# Allegro board F247_POWE_V12D.brd
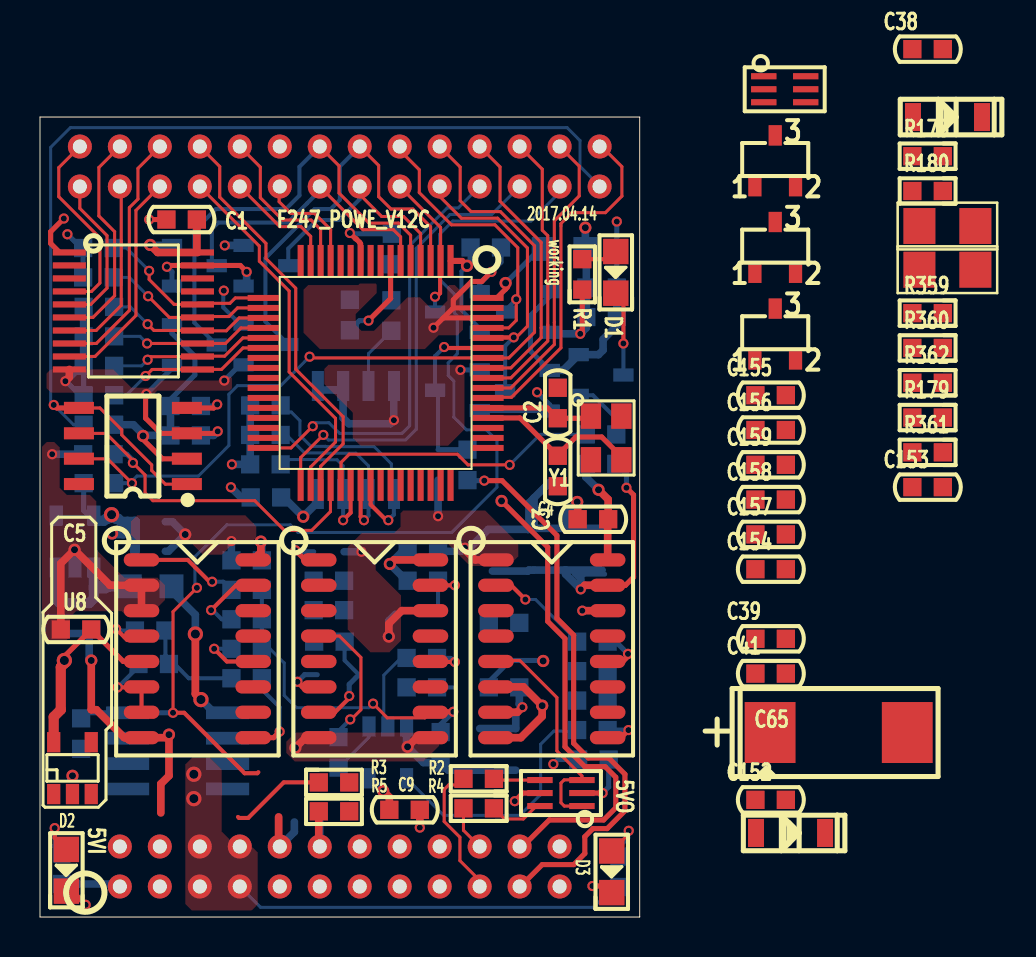
[diagram p0: board, top side]
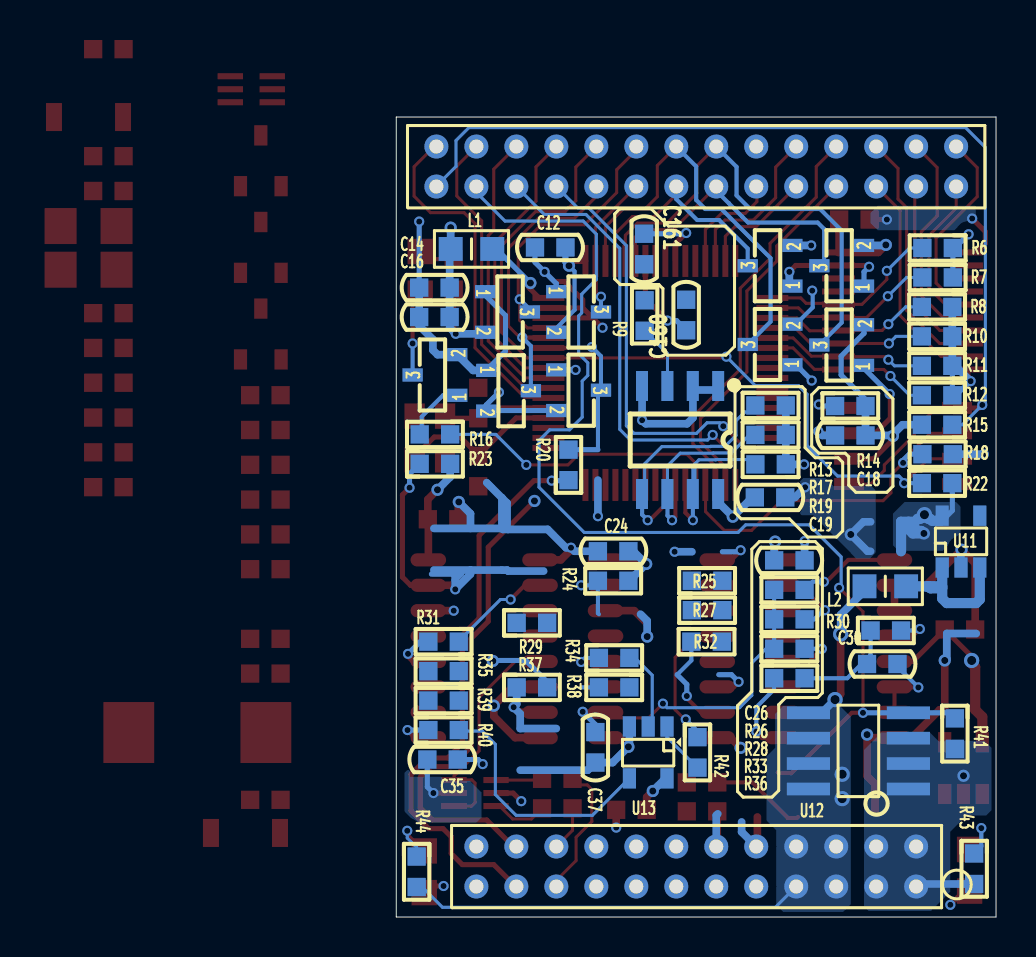
[diagram p1: board, bottom side, seen from below]

Outline 30 x 40 mm; copper layers: TOP, GND, POWER, BOTTOM. Coordinates in mm from the lower left corner of the outline.
Outline path: 0,40 0,0 30,0 30,40 0,40

## Design rules (mm)
constraint set DEFAULT: min track width 0.152

## Placement (name value [footprint] x y rotation side)
C1  0.1uF_50V  [CC0603]  7.09 34.87 180 top
C2  12PF_50V  [CC0603]  25.9 25.7 270 top
C3  12PF_50V  [CC0603]  25.9 22.3 270 top
C4  0.1uF_50V  [CC0603]  27.66 19.89 0 top
C5  0.1uF_50V  [CC0603]  1.8 14.38 0 top
C9  0.1uF_50V  [CC0603]  18.24 5.36 0 top
C12  0.1uF_50V  [CC0603]  22.3 33.48 0 bottom
C14  0.1uF_50V  [CC0603]  28.09 31.47 180 bottom
C16  10uF_10V  [CC0603]  28.09 30 180 bottom
C18  0.1uF_50V  [CC0603]  7.29 24.08 0 bottom
C19  0.1uF_50V  [CC0603]  11.3 20.98 180 bottom
C24  0.1uF_50V  [CC0603]  19.15 18.29 180 bottom
C26  0.1uF_50V  [CC0603]  10.34 17.83 0 bottom
C30  10uF/10V  [CC0603]  5.69 12.65 180 bottom
C35  0.1uF_50V  [CC0603]  27.69 7.87 0 bottom
C37  1nF_50V  [CC0603]  20.04 8.48 270 bottom
C38  4.7uF_16V  [CC0603]  44.4 43.39 0 top
C39  4.7uF_16V  [CC0603]  36.55 13.91 0 top
C41  4.7uF_16V  [CC0603]  36.55 12.17 0 top
C65  100uF_25V  [CC7343_31]  39.95 9.22 0 top
C152  10uF_10V  [CC0603]  36.55 5.86 0 top
C153  0.1uF_50V  [CC0603]  44.4 21.49 0 top
C154  10uF_10V  [CC0603]  36.55 17.39 0 top
C155  10uF_10V  [CC0603]  36.55 26.09 0 top
C156  10uF_10V  [CC0603]  36.55 24.35 0 top
C157  4.7uF_16V  [CC0603]  36.55 19.13 0 top
C158  4.7uF_16V  [CC0603]  36.55 20.87 0 top
C159  10uF_10V  [CC0603]  36.55 22.61 0 top
C160  4.7uF_16V  [CC0603]  15.5 30.1 90 bottom
C161  4.7uF_16V  [CC0603]  17.6 33.4 270 bottom
D1  LED_GREEN  [LED0805]  28.8 32.23 270 top
D2  LED_RED  [LED0805]  1.32 2.34 270 top
D3  LED_RED  [LED0805]  28.6 2.26 270 top
D4  1N4148W-TP  [SOD-123]  43.8 40 0 top
D9  MBR0520  [SOD-123]  35.94 4.2 0 top
L1  BLM21PG600  [LC0805]  26.24 33.4 180 bottom
L2  BLM21PG600  [LC0805]  5.54 16.54 180 bottom
Q2  BAT54S  [SOT23_123]  11.3 32.56 90 bottom
Q3  BAT54S  [SOT23_123]  7.72 32.56 90 bottom
Q4  BAT54S  [SOT23_123]  24.43 30.25 270 bottom
Q5  BAT54S  [SOT23_123]  20.88 30.25 270 bottom
Q6  BAT54S  [SOT23_123]  11.3 28.63 90 bottom
Q7  BAT54S  [SOT23_123]  7.72 28.6 90 bottom
Q8  S9013LT1G  [SOT23_123]  28.07 27.1 90 bottom
Q9  BAT54S  [SOT23_123]  20.88 26.34 270 bottom
Q10  BAT54S  [SOT23_123]  24.38 26.31 270 bottom
Q56  AO3415  [SOT23-3]  36.78 33.48 0 top
Q60  2N7002  [SOT23-3]  36.78 37.81 0 top
Q61  2N7002  [SOT23-3]  36.78 29.15 0 top
R1  10K  [RC0603]  27.13 32.13 270 top
R2  20R  [RC0603]  21.95 6.91 0 top
R3  1K  [RC0603]  14.71 6.73 180 top
R4  20R  [RC0603]  21.95 5.44 0 top
R5  47K  [RC0603]  14.71 5.28 0 top
R6  10K  [RC0603]  2.92 33.45 180 bottom
R7  10K  [RC0603]  2.92 31.98 180 bottom
R8  47K  [RC0603]  2.95 30.51 180 bottom
R9  0R  [RC0603]  17.58 30.07 270 bottom
R10  47K  [RC0603]  2.95 29.03 180 bottom
R11  47K  [RC0603]  2.95 27.56 180 bottom
R12  47K  [RC0603]  2.95 26.09 180 bottom
R13  10K  [RC0603]  11.28 25.58 0 bottom
R14  100K  [RC0603]  7.29 25.55 0 bottom
R15  10K  [RC0603]  2.95 24.61 180 bottom
R16  2K  [RC0603]  28.07 24.13 180 bottom
R17  10K  [RC0603]  11.28 24.1 0 bottom
R18  47K  [RC0603]  2.92 23.14 0 bottom
R19  10K  [RC0603]  11.28 22.63 180 bottom
R20  0R  [RC0603]  21.39 22.61 270 bottom
R22  10K  [RC0603]  2.95 21.69 0 bottom
R23  453K  [RC0603]  28.07 22.66 0 bottom
R24  267K  [RC0603]  19.15 16.81 0 bottom
R25  47K  [RC0603]  14.45 16.81 0 bottom
R26  0/NI  [RC0603]  10.34 16.36 0 bottom
R27  47K  [RC0603]  14.45 15.34 0 bottom
R28  0R  [RC0603]  10.34 14.88 0 bottom
R29  47K  [RC0603]  23.22 14.71 0 bottom
R30  140R  [RC0603]  5.51 14.33 0 bottom
R31  1K  [RC0603]  27.64 13.77 180 bottom
R32  267K  [RC0603]  14.48 13.77 0 bottom
R33  0/NI  [RC0603]  10.34 13.41 0 bottom
R34  1K  [RC0603]  19.1 12.95 0 bottom
R35  47K  [RC0603]  27.64 12.29 180 bottom
R36  330R  [RC0603]  10.34 11.94 0 bottom
R37  453K  [RC0603]  23.22 11.48 0 bottom
R38  47K  [RC0603]  19.1 11.48 180 bottom
R39  47K  [RC0603]  27.64 10.82 180 bottom
R40  1K  [RC0603]  27.64 9.35 0 bottom
R41  47K  [RC0603]  2.06 9.17 90 bottom
R42  1K  [RC0603]  14.94 8.23 90 bottom
R43  10K  [RC0603]  1.09 2.41 90 bottom
R44  10K  [RC0603]  28.98 2.26 90 bottom
R178  47K  [RC0603]  44.4 38.04 0 top
R179  1K  [RC0603]  44.4 24.97 0 top
R180  47K  [RC0603]  44.4 36.3 0 top
R181  5R  [R1206]  45.39 34.55 0 top
R359  1K  [RC0603]  44.4 30.19 0 top
R360  50K  [RC0603]  44.4 28.45 0 top
R361  1K  [RC0603]  44.4 23.23 0 top
R362  267K  [RC0603]  44.4 26.71 0 top
R363  5R  [R1206]  45.39 32.36 0 top
U1  SN74AHC245PWR  [SSOP20]  4.67 30.3 0 top
U2  MSP430F247TPM  [QFP64]  16.79 27.2 270 top
U3  SP706REN  [SOIC8]  4.65 23.55 90 top
U4  F247_MOD_a  [F247_MOD_A]  3.99 1.52 0 top
U5  HEF4521B  [SOP16]  7.87 13.41 270 top
U6  74HC123D  [SOP16]  16.74 13.41 270 top
U7  74HC123D  [SOP16]  25.6 13.41 270 top
U8  SPX3819M5-L-3-3/TR  [SOT23_5]  1.63 7.44 0 top
U9  74LVC2G14GW  [SOT363]  26.06 6.2 180 top
U10  AT24C512BN-SH25-T  [SOIC8]  15.8 23.85 0 bottom
U11  SPX3819M5-L-3-3/TR  [SOT23_5]  1.75 18.77 180 bottom
U12  SI4497DY-T1-GE3  [SO8]  6.88 8.31 90 bottom
U13  SN74AHC1G08DBVR  [SOT23_5]  17.4 8.23 0 bottom
U101  74LVC2G14GW  [SOT363]  37.25 41.39 0 top
Y1  DSX321G_8MHz/NI  [CRY3X2A]  27.56 25.04 270 top

## Library data of the parts
C1-C3 C9 C12 C14 C16 C35 C152 C153 = CAP NP
C4 C5 C18 C24 C26 C30 C37 = C_Generic
C19 = CAP_0
C38 C39 C41 C154-C161 = CAP NP_2
C65 = TMP_154254
D1-D3 = LED
D4 = DIODE13_7
D9 = DIODE13_0
L1 L2 = IND_BEAD_0805_600OHM_200MA
Q2-Q7 Q9 Q10 = PNP 2SB1386_0
Q8 = L14G1/TO_1
Q56 Q60 Q61 = MOS-P_0
R1 R9 R13 R16 R17 R19 R20 R43 R44 = RES
R2 R4 R14 R15 R18 R22-R39 R42 R178-R181 R360-R363 = R_Generic
R3 R5-R8 R10-R12 R40 R41 = R
R359 = R_10k_0603
U1 = 74HC245: User Part Number: ***; Tolerance: ***
U2 = MSP430F247TPM_0
U3 = SP706T
U4 = F247_MOD_a
U5 = CD4060BM_0
U6 U7 = 74HC123
U8 U9 U11 U101 = SN74AUP1G32YZPR_0
U10 = MEMEE_512MbX8_DBGA8_100KHZ_I2C
U12 = TPS7133_0
U13 = SN74AUP1G32YZPR_1
Y1 = SMD_OSC_1

## Footprints (pads in the part's own frame, mm; a bottom-side part is the same pattern mirrored in y, then rotated)
CC0603
  rect 0.914x0.914 smd: 1(-0.762,0) 2(0.762,0)
CC7343_31
  rect 2.54x3.048 smd: 1(-3.429,0) 2(3.429,0)
CRY3X2A
  rect 1.27x1.016 smd: 1(0,0) 2(2.184,0) 3(2.184,1.524) 4(0,1.524)
F247_MOD_A
  round 1.2 hole 0.7: 1(0,0) 2(0,2) 3(2,0) 4(2,2) 5(4,0) 6(4,2) 7(6,0) 8(6,2) 9(8,0) 10(8,2) 11(10,0) 12(10,2) 13(12,0) 14(12,2) 15(14,0) 16(14,2) 17(16,0) 18(16,2) 19(18,0) 20(18,2) 21(20,0) 22(20,2) 23(22,0) 24(22,2) 25(-2,35) 26(-2,37) 27(0,35) 28(0,37) 29(2,35) 30(2,37) 31(4,35) 32(4,37) 33(6,35) 34(6,37) 35(8,35) 36(8,37) 37(10,35) 38(10,37) 39(12,35) 40(12,37) 41(14,35) 42(14,37) 43(16,35) 44(16,37) 45(18,35) 46(18,37) 47(20,35) 48(20,37) 49(22,35) 50(22,37) 51(24,35) 52(24,37)
LC0805
  rect 1.194x1.194 smd: 1(-1.041,0) 2(1.041,0)
LED0805
  rect 1.27x1.27 smd: A(-1.041,0) C(1.041,0)
QFP64
  rect 1.6x0.3 smd: 1(-5.6,3.75) 2(-5.6,3.25) 3(-5.6,2.75) 4(-5.6,2.25) 5(-5.6,1.75) 6(-5.6,1.25) 7(-5.6,0.75) 8(-5.6,0.25) 9(-5.6,-0.25) 10(-5.6,-0.75) 11(-5.6,-1.25) 12(-5.6,-1.75) 13(-5.6,-2.25) 14(-5.6,-2.75) 15(-5.6,-3.25) 16(-5.6,-3.75) 33(5.6,-3.75) 34(5.6,-3.25) 35(5.6,-2.75) 36(5.6,-2.25) 37(5.6,-1.75) 38(5.6,-1.25) 39(5.6,-0.75) 40(5.6,-0.25) 41(5.6,0.25) 42(5.6,0.75) 43(5.6,1.25) 44(5.6,1.75) 45(5.6,2.25) 46(5.6,2.75) 47(5.6,3.25) 48(5.6,3.75)
  rect 0.3x1.6 smd: 17(-3.75,-5.6) 18(-3.25,-5.6) 19(-2.75,-5.6) 20(-2.25,-5.6) 21(-1.75,-5.6) 22(-1.25,-5.6) 23(-0.75,-5.6) 24(-0.25,-5.6) 25(0.25,-5.6) 26(0.75,-5.6) 27(1.25,-5.6) 28(1.75,-5.6) 29(2.25,-5.6) 30(2.75,-5.6) 31(3.25,-5.6) 32(3.75,-5.6) 49(3.75,5.6) 50(3.25,5.6) 51(2.75,5.6) 52(2.25,5.6) 53(1.75,5.6) 54(1.25,5.6) 55(0.75,5.6) 56(0.25,5.6) 57(-0.25,5.6) 58(-0.75,5.6) 59(-1.25,5.6) 60(-1.75,5.6) 61(-2.25,5.6) 62(-2.75,5.6) 63(-3.25,5.6) 64(-3.75,5.6)
R1206
  rect 1.6x1.8 smd: 1(-1.4,0) 2(1.4,0)
RC0603
  rect 0.914x0.914 smd: 1(-0.762,0) 2(0.762,0)
SO8
  rect 0.635x2.159 smd: 1(-1.905,-2.499) 2(-0.635,-2.499) 3(0.635,-2.499) 4(1.905,-2.499) 5(1.905,2.499) 6(0.635,2.499) 7(-0.635,2.499) 8(-1.905,2.499)
SOD-123
  rect 0.8x1.4 smd: 1(-0.127,0) 2(3.327,0)
SOIC8
  rect 0.6x1.5 smd: 1(-1.9,-2.7) 2(-0.63,-2.7) 3(0.64,-2.7) 4(1.91,-2.7) 5(1.91,2.7) 6(0.64,2.7) 7(-0.63,2.7) 8(-1.9,2.7)
SOP16
  oval 0.66x1.778 smd: 1(-4.445,-2.794) 2(-3.175,-2.794) 3(-1.905,-2.794) 4(-0.635,-2.794) 5(0.635,-2.794) 6(1.905,-2.794) 7(3.175,-2.794) 8(4.445,-2.794) 9(4.445,2.794) 10(3.175,2.794) 11(1.905,2.794) 12(0.635,2.794) 13(-0.635,2.794) 14(-1.905,2.794) 15(-3.175,2.794) 16(-4.445,2.794)
SOT23-3
  rect 0.66x1.016 smd: 1(-1.016,-1.27) 2(1.016,-1.27) 3(0,1.27)
SOT23_5
  rect 0.66x1.016 smd: 1(-0.94,-1.295) 2(0,-1.295) 3(0.94,-1.295) 4(0.94,1.295) 5(-0.94,1.295)
SOT23_123
  rect 0.66x1.016 smd: 1(-1.016,-1.118) 2(1.016,-1.118) 3(0,1.118)
SOT363
  rect 1.27x0.305 smd: 1(-1.05,0.65) 2(-1.05,0) 3(-1.05,-0.65) 4(1.05,-0.65) 5(1.05,0) 6(1.05,0.65)
SSOP20
  rect 1.651x0.305 smd: 1(-3.205,2.926) 2(-3.205,2.276) 3(-3.205,1.626) 4(-3.205,0.975) 5(-3.205,0.325) 6(-3.205,-0.325) 7(-3.205,-0.975) 8(-3.205,-1.626) 9(-3.205,-2.276) 10(-3.205,-2.926) 11(3.205,-2.926) 12(3.205,-2.276) 13(3.205,-1.626) 14(3.205,-0.975) 15(3.205,-0.325) 16(3.205,0.325) 17(3.205,0.975) 18(3.205,1.626) 19(3.205,2.276) 20(3.205,2.926)

## Nets
3.3V_OUT: C153.1 U101.5(VCC)
+5V_OUTB: L2.1 Q56.3 R44.1 U4.5 U4.6 U4.7 U4.8 U12.5 U12.6 U12.7 U12.8
GND: C1.2 C2.1 C3.2 C4.1 C5.1 C9.2 C12.2 C14.1 C16.1 C18.2 C19.2 C24.1 C26.1 C35.2 C37.2 C38.2 C39.2 C41.2 C65.2 C152.2 C153.2 C154.2 C155.2 C156.2 C157.2 C158.2 C160.2 C161.2 D2.C(CATHODE) D3.C(CATHODE) Q2.1 Q3.1 Q4.1 Q5.1 Q6.1 Q7.1 Q8.2(EMITTER) Q9.1 Q10.1 Q60.2(S) Q61.2(S) R5.1 R8.2 R9.1 R10.2 R11.2 R12.2 R18.1 R180.1 U1.1 U1.10 U1.19 U2.62 U2.63 U3.3 U4.9 U4.10 U4.11 U4.12 U4.36 U5.2 U5.3 U5.8 U6.6 U6.8 U6.9 U6.14 U7.1 U7.6 U7.8 U7.14 U8.2 U9.2 U10.1 U10.2 U10.4 U11.2 U13.3 U101.2 Y1.2 Y1.4
PV1_VOLT: Q2.3 U2.4 U4.39
PV2_VOLT: Q6.3 U2.3 U4.40
VCC_3.3V: C1.1 C12.1 C14.2 C16.2 C18.1 C19.1 C41.1 L1.1 Q2.2 Q3.2 Q4.2 Q5.2 Q6.2 Q7.2 Q9.2 Q10.2 R1.2 R6.2 R7.2 R13.1 R14.1 R15.1 R17.1 R19.2 R22.1 U1.20(VCC) U2.1 U3.2 U4.22 U10.8 U11.5(VOUT)
VCC_3.3VB: C4.2 C5.2 C9.1 C24.2 C26.2 C35.1 C39.1 D4.2(CATHODE) R23.1 R24.1 R25.1 R27.1 R29.1 R32.1 R35.1 R37.1 R38.1 R39.1 R362.1 U5.5 U5.16 U6.16(VCC) U7.16(VCC) U8.5(VOUT) U9.5(VCC) U13.5
VCC_5V: C38.1 L2.2(B) U11.1 U11.3
VCC_5V_IN: D9.1 R41.1 R43.1 R181.2 R363.2 U4.1 U4.2 U4.3 U4.4 U12.1 U12.2 U12.3(S3)
1QN_OUT: R179.1 R359.1 U7.4
1QN_OUT1: R42.2 U6.4
2Q_OUT: U7.5 U9.1 U9.3
2QN_OUT: R31.2 U7.2
2QN_OUT1: R34.2 U6.12
AND_OUT: R40.2 U7.9
BAT_VOLT: Q10.3 U2.60 U4.43
BUZZER_CON: U2.13 U4.35
CHARGE_CON1: U1.5 U4.25
CHARGE_CON1A: U1.7 U4.27
CHARGE_CON2: U1.4 U4.26
CHARGE_CON2A: U1.6 U4.28
CHARGE_CON11: R10.1 U1.13 U2.20
CHARGE_CON12: R8.1 U1.14 U2.19
CHARGE_CON_IN1: R7.1 U1.15 U2.18
CHARGE_CON_IN2: R6.1 U1.16 U2.17
CPU_RST: U2.15 U4.33
CTL_MAIN: R3.1 U101.4
CURR_BAT: Q4.3 U2.61 U4.42
CURR_CHARGE1: Q3.3 U2.6 U4.37
CURR_CHARGE2: Q7.3 U2.5 U4.38
CURR_OUT1: Q5.3 U2.2 U4.41
HEF4521_Q: C37.1 R26.2 R28.2 R33.2 U6.10
I2C0_SCLK: R17.2 U2.39 U10.6
I2C0_SDATA: R13.2 U2.40 U10.5
IIC_PROT: R19.1 U2.38 U10.7(WP)
JK_02_IN: U2.14 U4.34
JTAG_TCK: U2.57 U4.46
JTAG_TDI: U2.55 U4.50
JTAG_TDO: U2.54 U4.52
JTAG_TMS: U2.56 U4.48
LED_CON: R16.2 U2.37
POW_DOG: Q61.3 R41.2 U4.49 U12.4
POWER_CON1: R12.1 U1.11 U2.22
POWER_CON1A: U1.9 U4.29
POWER_CON2: R11.1 U1.12 U2.21
POWER_CON2A: U1.8 U4.30
RST1: C159.1 U3.8(WDO_N)
SP706_KEY_T: R15.2 U3.1 U3.5 U4.51
SYS_RESET#: R22.2 U2.58 U3.7 U4.44
TO_DSPORA9: R2.1 U4.19
TO_IMX283: R4.1 U4.20
UART0_RXD: U2.33 U4.47
UART0_TXD: U2.32 U4.45
UART1_RXD: U2.35 U4.32
UART1_TXD: U2.34 U4.31
VEREF+: C161.1 U2.10
VREF+: C160.1 U2.7
WDI_INPUT_A: R18.2 U2.36 U3.6
WORK_VCC: R20.2 U4.21
WORK_VOLT: Q9.3 R20.1 U2.59
XT2IN: C2.2 U2.53 Y1.1
XT2OUT: C3.1 U2.52(XT2OUT) Y1.3(X2)
N00951: L1.2(B) U2.64
N07708: R14.2 U3.4
N160653: Q8.1 R16.1
N160665: D1.A R1.1
N672879: R9.2 U10.3
N763890: C157.1 R32.2 U6.7
N764058: C158.1 R24.2 U6.15
N764114: R361.1 U6.1
N764204: R31.1 U7.12
N764364: C154.1 R37.2 U7.7
N764660: C155.1 C156.1 R23.2 U7.15
N765562: R40.1 U13.4(Y)
N765574: R42.1 U13.1
N766913: R36.2 U5.9
N766917: R28.1 U5.15
N766963: C30.2 U5.6 U5.7
N766967: C30.1 R30.2 R36.1
N766971: R33.1 U5.12
N767017: R30.1 U5.4(Y2)
N767221: R26.1 U5.1
N767465: R4.2 U9.6
N767469: R2.2 U9.4
N769621: C65.1 D9.2 U8.1 U8.3
N770867: D3.A R44.2
N770899: D2.A R43.2
N1607152: D1.C(CATHODE) Q8.3
N16667665: R29.2 U7.3
N16668057: R35.2 U7.11
N16668073: R39.2 U7.10
N16669380: Q56.2(S) R178.2 R181.1 R363.1
N16669452: Q56.1 Q60.3 R178.1
N16669584: Q60.1 R179.2 R180.2
N16672370: R359.2 U101.1
N16672374: R360.1 U101.6
N16672402: C152.1 R360.2 U101.3
N16679068: R25.2 U6.2
N16679079: R27.2 U6.3
N16680872: R38.2 U6.11
N16684137: R34.1 U13.2
N16686412: C159.2 D4.1 R361.2 R362.2
N16697134: Q61.1 R3.2 R5.2

Pads without a net: U1 2 3 17 18; U2 8 9 11 12 16 23 24 25 26 27 28 29 30 31 41 42 43 44 45 46 47 48 49 50 51; U4 13 14 15 16 17 18 23 24; U5 10 11 13 14; U6 5 13; U7 13; U8 4; U11 4

## Via types
v1: diameter 0.508, hole 0.305, TOP to BOTTOM, 81 vias
v2: diameter 0.61, hole 0.356, TOP to BOTTOM, 23 vias
v3: diameter 0.762, hole 0.457, TOP to BOTTOM, 6 vias

## Routing (per net, layer and track width the routed paths; a pad name or vN(x,y) marks a point on that pad's centre or on a via; arc(x,y) is an arc through that point)
+5V_OUTB: length 27.7
  TOP w0.381: v3(7.77,14.15) 7.77,11.15 v3(8.05,10.87)
  BOTTOM w0.152: R44.1 28.7,1.5 27.69,0.48 11.04,0.48 U4.7
  BOTTOM w0.381: v3(8.05,10.87) 8.71,10.21 U12.5 ; v3(7.77,14.15) 7.77,15.11 6.58,16.31 L2.1
  vias: v3(7.7,7.14) v3(7.7,5.92)
GND: length 176.7
  TOP w0.254: v1(8.89,24.28) 8.79,24.18 6.05,24.18 5.28,24.94 5.28,26.11 v1(5.32,26.15) ; v1(12.88,11.76) 13.13,11.51 U6.6 ; D2.C 1.6,1.3 v1(2.29,0.61) ; 20.67,30.45 20.17,29.95 ; 20.67,30.45 U2.63 ; 20.67,30.45 20.67,30.86 21.59,31.78 22.1,31.78 v1(22.58,32.26) ; 20.17,29.95 v1(19.68,29.46) ; 20.17,29.95 U2.62 ; v1(10.34,32.26) 10.02,32.58 U1.19 6.42,32.58 v1(6.35,32.51) ; v1(1.19,34.92) 0.53,34.26 0.53,33.68 0.99,33.23 U1.1 ; C1.2 v1(5.46,34.87) ; v1(27.64,1.55) 28.27,1.55 D3.C ; U9.2 v1(28.14,6.2)
  TOP w0.381: U6.14 18.1,15.32 17.45,14.67 v2(17.45,14.02) ; U6.9 18.85,8.97 v2(18.39,8.51) ; v1(1.27,26.79) 1.47,26.99 U1.10 ; U4.12 13.94,3.57 R5.1 ; U7.14 v1(27.13,15.32) ; v2(12.78,8.46) 13.28,8.97 U6.8 ; 6.05,5.21 6.05,6.65 6.45,7.06 v2(6.45,9.12) 6.3,8.97 U5.8 4.22,8.97 2.82,10.36 2.57,10.36 v2(2.57,12.83) ; U4.10 11.94,3.58 11.94,5 ; C5.1 1.04,17.68 v2(1.73,18.36) 3.51,16.59 U5.2 U5.3 ; C4.1 26.9,20.73 v2(26.87,20.75) ; v1(21.26,18.47) 21.34,18.39 21.34,18.29 21.77,17.86 U7.1 ; U7.6 24.18,11.51 v2(25.12,10.57) 25.12,10.03 24.05,8.97 U7.8 ; C9.2 v1(19,4.47)
  GND w0.152: 20.98,0.74 20.98,4.78 ; 13,35.61 13,37.51 U4.36 11,37.53 11,35.74 ; 21.03,35.31 21.03,39.42 ; 6.99,35.64 6.99,39.4 ; 25.02,35.51 25.02,39.37 ; 6.99,0.64 6.99,4.78 ; 16.99,35.56 16.99,39.4
  BOTTOM w0.254: Q9.1 v1(21.03,27.36) ; v1(1.27,26.79) 1.3,26.79 2.01,26.09 R12.2 R11.2 ; v1(28.14,6.2) 28.45,6.5 C35.2 ; Q10.1 24.54,28.3 24.54,30.07 25.55,31.09 Q4.1 ; 13.87,12.12 13.23,12.12 v1(12.88,11.76) ; Q7.1 6.6,27.43 v1(5.32,26.15) ; Q3.1 6.6,32.26 v1(6.35,32.51) ; Q6.1 10.01,27.61 v1(9.22,26.82) ; C14.1 v1(28.85,34.77) ; C12.2 23.06,32.74 v1(22.58,32.26) 22,31.67 Q5.1
  BOTTOM w0.381: C26.1 v1(9.58,18.8) ; C18.2 8.69,24.08 v1(8.89,24.28) ; U13.3 18.34,8.56 v2(18.39,8.51) 19.18,7.72 C37.2 20.42,7.34 23.8,7.34 ; 24.41,19.38 24.46,19.43 24.46,20.7 24.71,20.95 ; 24.41,19.38 24.66,19.38 24.71,19.43 ; 24.41,19.38 22.43,19.38 21.51,18.47 v1(21.26,18.47) 21.08,18.29 C24.1 ; C19.2 10.06,20.98 v1(9.55,21.49) ; 6.27,19.76 6.63,19.76 v2(7.26,19.13) 6.43,18.29 6.27,18.29 ; v2(17.45,14.02) 17.45,14.81 17.78,15.14 ; R18.1 v1(0.61,23.14) ; 24.71,20.95 25.48,21.72 ; 24.71,20.95 24.71,19.43 ; 26.29,19.43 26.29,20.17 v2(26.87,20.75) ; 26.29,19.43 28.12,19.43 ; 26.29,19.43 24.71,19.43 ; 12.73,4.75 12.73,4.26 U4.10 ; 19.91,21.84 v1(19.91,20.04) ; 17.7,26.35 v1(17.7,24.84) 17.53,24.66 15.45,24.66 15.16,24.95 15.16,26.35 13.89,26.35 ; 13.92,5.16 13.99,5.08 U4.12 ; v2(2.57,12.83) 2.46,12.93 2.46,14.17 0.99,14.17 ; R8.2 R10.2 R11.2 2.04,27.56 v1(1.27,26.79) ; C14.1 C16.1 28.85,29.57 28.17,28.88 28.17,28.35 27.94,28.12 Q8.2 26.16,27.33 Q10.1 ; v1(10.34,32.26) 10.34,31.7 Q2.1 ; 15.21,18.26 v1(16.08,18.26) ; v2(1.73,18.36) 1.75,18.34 U11.2
  vias: v2(1.63,7.06)
PV1_VOLT: length 11.7
  TOP w0.152: U4.39 15.99,36.13 17.09,35.03 18.19,35.03 19.04,34.17 U2.4
  BOTTOM w0.203: Q2.3 12.42,33.42 13.85,34.85 14.95,34.85 15.99,35.89 U4.39
PV2_VOLT: length 20.6
  TOP w0.152: U2.3 19.54,34.51 18.65,35.4 17.56,35.4 16.94,36.02 16.94,37.58 U4.40
  BOTTOM w0.203: U4.40 15,37.53 15,35.85 14.55,35.4 13.73,35.4 11.28,32.94 11.28,29.77 Q6.3
VCC_3.3V: length 84
  TOP w0.254: 7.15,22.91 6.12,22.91 5.16,23.88 v2(5.16,24.05) ; v2(23.09,20.8) 25.4,18.49 25.4,14.78 26.26,13.92 26.26,8.51 27.25,7.52 28.27,7.52 28.8,6.99 28.8,5.46 28.19,4.85 25.48,4.85 24.15,3.52 U4.22 ; v1(27.03,29.16) 27.13,29.26 R1.2
  TOP w0.305: U2.1 21.12,32.8 v2(21.36,32.56)
  TOP w0.381: v2(5.51,33.6) 5.89,33.23 U1.20 7.85,33.26 C1.1
  BOTTOM w0.203: Q5.2 22,29.44 21.08,30.35 21.08,32.28 v2(21.36,32.56) ; v1(9.19,31.32) 9.17,31.29 9.17,30.48 10.01,29.64 Q6.2 ; 3.2,19.81 4.7,19.81 4.75,19.76
  BOTTOM w0.254: v1(24.87,26.24) 25.5,25.6 Q10.2 25.48,25.32 Q9.2 ; v1(1.37,34.14) 2.06,33.45 R6.2 R7.2 ; 3.48,19.81 3.48,20.12 v3(3.58,20.12) ; Q7.2 6.6,29.18 7.75,28.04 7.75,27.1 6.53,25.88 R14.1 ; 2.69,19.81 2.18,20.32 R22.1
  BOTTOM w0.305: C12.1 21.54,32.74 v2(21.36,32.56)
  BOTTOM w0.381: Q3.2 5.54,33.58 v2(5.51,33.6) ; R15.1 4.67,24.61 5.05,24.23 5.05,24.16 v2(5.16,24.05) 5.18,24.08 C18.1 R14.1 ; Q4.2 25.63,29.16 v1(27.03,29.16) 27.33,29.46 C16.2 C14.2 27.33,33.35 L1.1 v2(27.28,34.47) ; v1(9.6,22.63) R19.2 R17.1 R13.1 ; 12.06,20.98 12.19,20.98 13.16,20.02 v2(13.17,20.02) 13.89,20.74 13.89,21.35 ; Q2.2 v1(9.25,33.58)
  BOTTOM w0.508: 4.75,19.76 4.17,19.18 v2(3.61,19.18) 3.73,19.3 3.92,19.3 4.38,19.76 ; 4.75,19.76 4.75,18.29 ; 4.75,19.76 4.38,19.76 ; 4.38,19.76 4.06,19.76 3.91,19.91 3.78,19.91 v3(3.58,20.12) 3.38,19.91 3.3,19.91 3.2,19.81 2.69,19.81
VCC_3.3VB: length 30.8
  TOP w0.254: U5.5 4.17,12.78 C5.2 1.22,13.03 v3(1.22,12.83) ; v1(23.75,5.79) 24.16,6.2 U9.5
  TOP w0.381: 28.42,20.14 28.4,20.12 28.4,19.86 ; 28.42,20.14 28.42,20.88 v2(27.94,21.36) ; 28.42,20.14 C4.2 28.4,19.86 ; U5.16 11.05,18.24 v2(11.05,18.77) ; U7.16 28.4,19.86 ; U6.16 17.7,17.86 v2(17.5,17.65) ; C9.1 17.48,5.99 v2(17.17,6.3)
  TOP w0.508: U8.5 0.69,10.01 1.04,10.36 1.04,12.5 1.22,12.67 v3(1.22,12.83)
  BOTTOM w0.203: R38.1 20.75,11.48
  BOTTOM w0.254: v1(25.68,7.65) 25.91,7.87 C35.1 ; v2(25.17,12.8) 25.15,12.83 23.52,12.83 22.45,11.76 R37.1
  BOTTOM w0.381: v2(27.94,21.36) 27.3,22 R23.1 ; v2(17.17,6.3) 16.54,6.93 U13.5 ; v2(11.05,18.77) 11.05,18.69 11.1,18.64 C26.2 ; C24.2 18.14,18.29 v2(17.5,17.65) 18.34,16.81 R24.1
VCC_5V: length 7.8
  BOTTOM w0.508: 2.69,16.43 3.28,16.43 3.38,16.54 ; 2.69,16.43 2.69,16.54 ; 2.69,16.43 2.69,15.93 2.46,15.7 0.99,15.7 0.81,15.88 U11.3 ; L2.2 3.38,16.54 ; 3.38,16.54 2.69,16.54 ; 3.38,16.54 3.42,16.5 ; 2.69,16.54 U11.1
VCC_5V_IN: length 3
  BOTTOM w0.381: 1.09,1.65 3.87,1.65 U4.1
1QN_OUT1: length 7
  TOP w0.152: v1(15.52,9.88) 15.57,9.88 16.05,10.36 16.05,12.98 14.99,14.05 U6.4
  BOTTOM w0.203: v1(15.52,9.88) 14.94,9.3 R42.2
2Q_OUT: length 11.7
  TOP w0.152: U7.5 22.86,12.83 24,12.83 25.86,10.97 25.86,8.31 27.11,7.05 U9.3 27.1,6.86 26.22,6.86 26.06,6.7 26.06,5.71 26.23,5.55 U9.1
2QN_OUT: length 5.2
  TOP w0.203: v1(24.28,15.88) 23.57,16.59 U7.2
  BOTTOM w0.152: R31.2 26.87,13.79 24.79,15.88 v1(24.28,15.88)
2QN_OUT1: length 2.2
  TOP w0.203: U6.12 19.56,12.75 v1(20.75,12.75)
  BOTTOM w0.203: v1(20.75,12.75) 20.55,12.95 R34.2
AND_OUT: length 2.2
  TOP w0.254: U7.9 29.06,8.97 v1(29.44,9.35)
  BOTTOM w0.254: R40.2 v1(29.44,9.35)
BAT_VOLT: length 16.3
  TOP w0.152: U4.43 19.99,36.03 21.08,34.94 22.89,34.94 24.38,33.45 24.38,29.54 23.8,28.95 U2.60
  TOP w0.203: v1(23.7,28.98) 22.42,28.98 U2.60
  BOTTOM w0.203: v1(23.7,28.98) 23.27,28.55 Q10.3
BUZZER_CON: length 5.5
  TOP w0.152: U4.35 11.96,36.49 11.96,35.76 12.55,35.18 13.73,35.18 14.54,34.37 U2.13
CHARGE_CON1: length 7.9
  TOP w0.152: U4.25 1.99,35.43 3.35,34.07 3.35,31.45 2.53,30.63 U1.5
CHARGE_CON1A: length 9.1
  TOP w0.152: U4.27 4.06,36.45 4.06,30.58 2.81,29.33 U1.7
CHARGE_CON2: length 9.8
  TOP w0.152: U1.4 2.58,31.28 3,31.7 3,33.96 0.94,36.02 0.94,37.47 U4.26
CHARGE_CON2A: length 10.9
  TOP w0.152: U4.28 2.95,37.48 2.95,35.05 3.73,34.26 3.73,31.06 2.65,29.98 U1.6
CHARGE_CON11: length 8
  TOP w0.152: U2.20 10.05,29.45 9.28,28.68 U1.13 v1(5.36,28.68)
  BOTTOM w0.152: v1(5.36,28.68) 5,29.03 R10.1
CHARGE_CON12: length 8.2
  TOP w0.152: v1(5.38,29.64) 5.7,29.33 U1.14 7.89,29.31 9.32,29.31 9.96,29.95 U2.19
  BOTTOM w0.152: R8.1 4.52,30.51 v1(5.38,29.64)
CHARGE_CON_IN1: length 8.5
  TOP w0.152: U2.18 9.88,30.45 9.45,30.02 7.92,30.02 U1.15 6.47,29.98 v1(5.41,31.04)
  BOTTOM w0.152: R7.1 4.47,31.98 v1(5.41,31.04)
CHARGE_CON_IN2: length 9.1
  TOP w0.152: U2.17 9.77,30.95 9.5,30.68 7.93,30.68 U1.16 7.87,30.63 6.71,30.63 5.46,31.88 v1(5.46,32.31)
  BOTTOM w0.152: R6.1 4.32,33.45 v1(5.46,32.31)
CPU_RST: length 5.8
  TOP w0.152: U2.15 13.54,34.03 13.06,34.52 12,34.52 U4.33
CURR_BAT: length 14.9
  TOP w0.152: U2.61 23.44,29.45 23.83,29.83 v1(23.83,30.89) 23.9,30.96 23.9,33.47 22.76,34.61 20.58,34.61 18.97,36.22 18.97,37.36 17.99,38.34 U4.42
  BOTTOM w0.203: Q4.3 23.32,30.38 v1(23.83,30.89)
CURR_CHARGE1: length 14.6
  TOP w0.152: U4.37 16.15,34.37 17.68,34.37 18.04,34 U2.6
  BOTTOM w0.203: U4.37 13.99,36.32 13.36,35.68 12.4,34.72 8.92,34.72 8.6,34.4 8.6,32.8 Q3.3
CURR_CHARGE2: length 23.5
  TOP w0.152: U2.5 18.54,34.09 17.93,34.7 16.46,34.7 14.96,36.2 14.96,37.56 U4.38
  BOTTOM w0.203: Q7.3 7.72,29.72 7.72,34.32 8.8,35.4 12.3,35.4 12.98,36.08 12.98,37.51 U4.38
CURR_OUT1: length 7.3
  TOP w0.152: U2.2 20.04,34.48 U4.41
  TOP w0.203: v1(19.76,31.01) 19.84,31.01 20.02,31.19 20.02,32.78 U2.2
  BOTTOM w0.203: Q5.3 v1(19.76,31.01)
HEF4521_Q: length 16.5
  TOP w0.152: v1(16.66,10.67) 17.37,9.96 19.25,9.96 U6.10
  TOP w0.254: U6.10 19.56,10.26 v1(20.68,10.26)
  BOTTOM w0.152: v1(16.66,10.67) 16.46,10.46 12.83,10.46 12.22,11.07 12.22,12.7 11.51,13.41 R33.2
  BOTTOM w0.203: R26.2 R28.2 R33.2
  BOTTOM w0.254: C37.1 20.04,9.63 v1(20.68,10.26)
I2C0_SCLK: length 9.7
  TOP w0.203: U2.39 16.04,20.01 v1(16.21,19.84)
  BOTTOM w0.152: R17.2 12.33,24.1 13.23,23.2 14.14,23.2 14.15,23.19 15.8,23.19 16.43,22.56 16.43,21.48
  BOTTOM w0.203: v1(16.21,19.84) 16.43,20.07 16.43,21.48
I2C0_SDATA: length 12.4
  TOP w0.203: U2.40 16.54,20.62 17.32,19.84 v1(17.42,19.84)
  BOTTOM w0.152: 17.7,21.48 17.58,21.61 17.58,22.66 16.71,23.52 14.29,23.52 14.28,23.53 13.55,23.53 13,24.08 13,24.82 12.57,25.25 12.37,25.25 R13.2
  BOTTOM w0.203: v1(17.42,19.84) 17.7,20.12 17.7,21.48
IIC_PROT: length 9.2
  TOP w0.203: v1(15.16,19.84) 15.54,20.22 U2.38
  BOTTOM w0.152: 15.06,22.66 14.86,22.86 14.02,22.86 14,22.87 12.28,22.87 R19.1 ; 15.06,22.66 15.06,21.58 15.16,21.48 15.16,22.56 15.06,22.66
  BOTTOM w0.203: 15.16,21.48 v1(15.16,19.84)
JK_02_IN: length 8.2
  TOP w0.152: U4.34 11.02,37.49 11.02,35.96 12.14,34.85 13.56,34.85 14.04,34.37 U2.14
JTAG_TCK: length 14.1
  TOP w0.152: U2.57 23.55,27.45 25.07,28.97 25.07,29.46 25.07,33.73 23.01,35.79 23.01,37.51 U4.46
JTAG_TDI: length 15.1
  TOP w0.152: U2.55 23.55,26.45 25.73,28.63 25.73,29.74 25.73,34.81 26.97,36.05 26.97,37.54 U4.50
JTAG_TDO: length 17.5
  TOP w0.152: U2.54 22.42,25.98 23.58,25.98 26.06,28.46 26.06,34.55 26.06,34.67 26.61,35.22 28.28,35.22 29.11,36.04 29.11,37.52 28.1,38.52 U4.52
JTAG_TMS: length 14.1
  TOP w0.152: U4.48 25.13,37.39 25.13,34.34 25.4,34.07 25.4,29.6 25.4,28.8 23.55,26.95 U2.56
LED_CON: length 14.4
  TOP w0.152: U2.37 15.06,21.63 15.06,22.73 15.47,23.14 20.88,23.14 21.41,22.61 v1(23.5,22.61)
  BOTTOM w0.152: R16.2 25.02,24.13 v1(23.5,22.61)
POW_DOG: length 57.4
  TOP w0.152: v1(6.65,10.21) 6.65,15.27 v1(7.85,16.46)
  TOP w0.203: 10.92,7.24 10.87,7.19 10.24,7.19 7.21,10.21 v1(6.65,10.21)
  BOTTOM w0.152: v1(7.85,16.46) 7.75,16.56 7.75,18.01 9.35,19.61 12.52,19.61 12.9,19.23 20.6,19.23 22.86,21.49 22.86,23.83 22.33,24.36 21.34,24.36 20.7,24.99 20.7,26.8 20.42,27.08 20.42,27.71 20.88,28.17 20.88,30.05 20.73,30.21 20.73,31.14 19.99,31.88 19.99,34.14 20.65,34.8 24.56,34.8 25.99,36.23 U4.49
  BOTTOM w0.254: R41.2 2.34,10.21 U12.4 v1(6.65,10.21)
POWER_CON1: length 8.5
  TOP w0.152: v1(5.28,27.05) 5.61,27.38 U1.11 7.88,27.38 9.08,27.38 10.15,28.45 U2.22
  BOTTOM w0.152: v1(5.28,27.05) 4.32,26.09 R12.1
POWER_CON1A: length 11.1
  TOP w0.152: U4.29 4.8,35.33 4.8,30.07 2.75,28.03 U1.9
POWER_CON2: length 8.1
  TOP w0.152: v1(5.38,27.86) 5.54,28.02 7.87,28.02 U1.12 7.89,28.04 9.24,28.04 10.15,28.95 U2.21
  BOTTOM w0.152: v1(5.38,27.86) 5.08,27.56 R11.1
POWER_CON2A: length 12.5
  TOP w0.152: U1.8 2.82,28.68 4.47,30.33 4.47,35.47 4.9,35.9 4.9,37.43 U4.30
SP706_KEY_T: length 53.2
  TOP w0.152: 2.45,25.45 3,25.45 4.09,24.36 4.09,24.1 5.59,22.61 5.59,22.33 6.27,21.64 7.15,21.64
  TOP w0.254: 2.45,25.45 0.84,25.45 v1(0.69,25.6)
  BOTTOM w0.152: U4.51 27.99,36.55 27.01,37.53 27.01,38.82 26.37,39.47 1.52,39.47 0.53,38.48 0.53,25.76 v1(0.69,25.6) ; 0.81,25.45 0.81,25.48 1.68,24.61 R15.2
  BOTTOM w0.254: v1(0.69,25.6) 0.81,25.48
SYS_RESET#: length 41
  TOP w0.152: 2.07,22.91 3.38,22.91 v1(4.6,21.69) ; 13.53,28.05 v1(13.49,28.02) 13.55,27.95 U2.58 23.45,27.95 24.74,29.24 24.74,33.56 23.03,35.27 21.56,35.27 21.02,35.81 21.02,37.5 U4.44
  BOTTOM w0.152: v1(4.6,21.69) 4.6,21.79 4.85,22.05 7.92,22.05 9.45,23.57 9.45,26.14 9.88,26.57 12.04,26.57 v1(13.49,28.02)
  BOTTOM w0.203: R22.2 v1(4.6,21.69)
TO_DSPORA9: length 6.8
  TOP w0.152: U4.19 21.99,1.83 21.01,2.82 21.01,3.99 20.22,4.78 20.22,6.38 20.45,6.6 20.88,6.6 R2.1
TO_IMX283: length 2.2
  TOP w0.152: U4.20 21.18,4.33 R4.1
UART0_RXD: length 23.4
  TOP w0.152: v1(14.17,24.1) 13.04,22.97 U2.33
  BOTTOM w0.152: U4.47 22.6,35.13 20.51,35.13 18.82,33.44 18.82,24.38 18.29,23.85 14.43,23.85 v1(14.17,24.1)
UART0_TXD: length 21.9
  TOP w0.152: v1(13.64,24.54) 12.56,23.45 U2.32
  BOTTOM w0.152: U4.45 20.93,35.46 20.38,35.46 18.49,33.57 18.49,24.56 18.11,24.18 14.99,24.18 14.45,24.71 13.82,24.71 v1(13.64,24.54)
UART1_RXD: length 20.4
  TOP w0.152: U2.35 14.04,22.54 15.16,23.66 15.16,25.02 12.79,27.39 12.79,31.44 11.3,32.93 11.3,33.68 8.99,35.99 8.99,37.53 U4.32
UART1_TXD: length 18.2
  TOP w0.152: U2.34 13.54,22.5 14.78,23.75 14.78,24.93 12.46,27.25 12.46,31.3 10.97,32.79 10.97,33.55 U4.31
VEREF+: length 3.7
  TOP w0.254: v1(15.5,34.2) 15.79,33.91 15.82,33.91 15.99,33.73 15.99,33.71 16.04,33.66 U2.10
  BOTTOM w0.254: C161.1 15.54,34.16 v1(15.5,34.2)
VREF+: length 4.6
  TOP w0.254: v1(16.43,29.82) 17.54,30.93 U2.7
  BOTTOM w0.254: v1(16.43,29.82) 15.98,29.82 C160.1
WDI_INPUT_A: length 18
  TOP w0.152: 2.07,24.18 3.3,24.18 4.65,22.83 v1(4.65,22.71) 5.26,22.1 5.26,21.21 5.65,20.82 10.74,20.82 12.23,19.33 13.59,19.33 14.53,20.27 14.53,21.59 U2.36
  BOTTOM w0.254: R18.2 4.34,23.14 4.65,22.83 v1(4.65,22.71)
WORK_VCC: length 28.7
  TOP w0.254: U4.21 24.03,1.52 25.12,2.62 26.7,2.62 27.25,3.17 27.25,4.01 27.66,4.42 28.37,4.42 29.26,5.31 29.26,7.14 28.45,7.95 27.43,7.95 26.7,8.69 26.7,14.1 25.86,14.94 25.86,19.08 23.11,21.82 v1(22.23,21.82)
  BOTTOM w0.254: v1(22.23,21.82) 21.41,21.82 R20.2
WORK_VOLT: length 11.2
  TOP w0.152: U2.59 22.36,28.42 20.29,28.42 20.26,28.45
  TOP w0.203: U2.59 20.26,28.45 v1(20.22,28.5)
  BOTTOM w0.203: 19.91,23.37 19.91,26.19 Q9.3 19.76,28.04 v1(20.22,28.5)
  BOTTOM w0.254: 19.91,23.37 R20.1
XT2IN: length 5.4
  TOP w0.254: U2.53 25.38,25.45 C2.2 27.45,24.94 Y1.1
XT2OUT: length 8.5
  TOP w0.254: U2.52 24.01,24.95 C3.1 25.9,23.1 26.8,24 28.1,24 29.08,23.02 Y1.3
N00951: length 4.1
  TOP w0.254: U2.64 22.85,30.95 23.29,31.39 ; 23.39,31.5 23.29,31.39 ; 23.29,31.39 v2(23.29,31.7)
  BOTTOM w0.254: v2(23.29,31.7) 24.99,33.4 L1.2
N07708: length 2.6
  TOP w0.254: 7.15,25.45 8.69,25.45 v1(8.86,25.63)
  BOTTOM w0.254: R14.2 8.79,25.55 v1(8.86,25.63)
N160653: length 3.2
  BOTTOM w0.203: R16.1 28.73,24.23 28.73,25.02 27.66,26.09 Q8.1
N160665: length 1.8
  TOP w0.203: D1.A 28.42,32.89 R1.1
N672879: length 3.4
  BOTTOM w0.152: 16.43,26.35 16.43,28.17 R9.2
N763890: length 5.1
  TOP w0.203: v1(15.47,11.05) 15.47,10.95 14.76,10.24 U6.7
  BOTTOM w0.203: 15.95,12.12 15.24,12.83 R32.2
  BOTTOM w0.254: v1(15.47,11.05) 15.47,11.63 15.95,12.12
N764058: length 3.8
  TOP w0.203: U6.15 v1(20.75,16.59)
  BOTTOM w0.203: 19.86,15.14 19.91,15.19 R24.2 20.14,16.59 v1(20.75,16.59)
N764114: length 2.3
  TOP w0.254: U6.1 13.26,17.86 v1(12.78,18.34)
  BOTTOM w0.254: 13.69,18.26 12.85,18.26 v1(12.78,18.34)
N764204: length 2.5
  TOP w0.254: U7.12 29.16,12.78 29.41,13.03 v1(29.41,13.16)
  BOTTOM w0.254: R31.1 28.8,13.77 v1(29.41,13.16)
N764364: length 5.5
  TOP w0.381: U7.7 23.88,10.24 v1(24.13,10.49)
  BOTTOM w0.381: 22,9.42 23.8,9.42 23.8,10.16 v1(24.13,10.49) 23.98,10.64 R37.2
N764660: length 18.7
  TOP w0.254: v1(29.34,21.46) 29.69,21.11 29.69,16.99 29.29,16.59 U7.15
  TOP w0.381: U7.15 27.25,16.59 v1(27.05,16.38)
  BOTTOM w0.254: 24.41,17.3 24.66,17.3 24.71,17.35 ; 27.1,17.14 26.75,17.14 27.05,16.84 ; 27.11,17.14 28.24,17.14 ; R23.2 29.34,22.15 v1(29.34,21.46)
  BOTTOM w0.381: 22.63,17.3 24.41,17.3 24.46,17.35 26.29,17.35 ; 27.11,17.14 27.1,17.14 27.05,17.09 v1(27.05,16.38) 26.29,17.14 26.29,17.35 ; 26.29,17.35 28.12,17.35
N765562: length 12.5
  BOTTOM w0.152: U13.4 20.19,5.08 24,5.08 25.04,6.12 25.04,8.64 25.7,9.3 26.82,9.3 R40.1
N765574: length 2.7
  BOTTOM w0.152: R42.1 16.46,8.99 U13.1
N766913: length 4.7
  TOP w0.152: 11.86,9.14 11.86,9.12 11.71,8.97 11.68,8.97
  TOP w0.254: v1(11.99,9.27) 11.68,8.97 U5.9
  BOTTOM w0.203: v1(11.99,9.27) 11.99,10.49 11.1,11.38 R36.2
N766917: length 3.8
  TOP w0.203: v1(8.56,15.34) 9.8,16.59 U5.15
  BOTTOM w0.203: R28.1 9.09,14.88 8.64,15.34 v1(8.56,15.34)
N766963: length 4
  TOP w0.203: U5.7 U5.6 5.05,11.48 v1(3.89,11.48)
  BOTTOM w0.203: 4.65,12.65 4.65,12.24 v1(3.89,11.48)
N766967: length 5
  BOTTOM w0.203: R36.1 7.44,11.94 6.27,13.11 R30.2
N766971: length 3.1
  TOP w0.203: v1(8.71,13.41) 9.35,12.78 U5.12
  BOTTOM w0.203: R33.1 v1(8.71,13.41)
N767017: length 2.5
  TOP w0.203: v1(3.81,14.4) 4.34,13.87 4.9,13.87 U5.4
  BOTTOM w0.203: v1(3.81,14.4) 3.89,14.33 R30.1
N767221: length 5.1
  TOP w0.203: U5.1 7.39,17.86 8.48,16.76 v1(8.61,16.76)
  BOTTOM w0.203: v1(8.61,16.76) 9.17,16.76 R26.1
N767465: length 2.8
  TOP w0.152: U9.6 24.83,5.55 24.18,4.9 23.24,4.9 R4.2
N767469: length 2.3
  TOP w0.152: U9.4 22.77,6.85 R2.2
N770867: length 2.8
  TOP w0.152: D3.A 29.45,4.15 v1(29.45,4.31)
  BOTTOM w0.152: v1(29.45,4.31) 29.45,3.95 28.98,3.48 R44.2
N770899: length 2.7
  TOP w0.203: v1(0.74,4.45) 0.74,3.96 D2.A
  BOTTOM w0.203: v1(0.74,4.45) 0.74,3.53 R43.2
N1607152: length 4.2
  TOP w0.203: D1.C 29.18,30.81 v1(29.18,28.68)
  BOTTOM w0.203: Q8.3 v1(29.18,28.68)
N16684137: length 4.2
  BOTTOM w0.152: U13.2 17.2,9.73 17.2,12.09 18.06,12.95 R34.1
N16697134: length 4.8
  TOP w0.203: R3.2 12.19,6.73 10.41,4.95 9.96,4.95 9.91,5

## Copper pours and planes (outline as drawn; the poured copper is in the pictures)
+5V_OUTB on TOP: 10.59,0.33 7.59,0.33 7.26,0.66 7.26,7.62 7.62,7.98 8.48,7.98 9.09,7.37 9.09,4.27 9.88,3.48 10.64,3.48 10.9,3.23 10.9,0.64
+5V_OUTB on BOTTOM: 10.64,0.25 7.65,0.25 7.26,0.64 7.26,10.01 7.8,10.54 10.67,10.54 11.05,10.16 11.05,8.46 11.48,8.03 11.48,4.83 11,4.34 11,0.61
GND on TOP: 15.93,31.6 13.41,31.6 13.18,31.37 13.18,29.21 14,28.4 19.25,28.4 19.94,29.08 20.88,29.08 21.16,29.36 21.16,31.19 20.75,31.6 20.47,31.6 20.37,31.5 20.37,30.81 20.02,30.45 19.53,30.45 19,30.99 18.39,30.99 16.71,29.31 16.08,29.31 15.8,29.59 15.8,30.15 16.84,31.19 16.84,31.62 16.79,31.67 16,31.67
GND on TOP: 16.03,23.57 20.42,23.57 21.23,24.38 21.23,27.43 21.06,27.61 14.43,27.61 14.22,27.41 14.22,26.54 15.6,25.17 15.6,24
GND on TOP: 18.16,20.32 22.28,20.32 23.93,18.67 23.93,18.03 23.44,17.55 21.51,17.55 20.38,18.68 20.37,18.67 17.53,18.67 16.79,17.93 16.79,17.35 18.06,16.08 18.06,13.82 17.48,13.23 16.54,13.23 15.39,14.38 15.39,18.49 16.1,19.2 17.73,19.2 18.03,19.51 18.03,20.19
GND on TOP: 12.75,7.77 19.18,7.77 19.96,8.56 19.96,8.89 19.63,9.22 12.78,9.22 12.32,8.76 12.32,8.2
GND on TOP: 2.49,21.11 1.35,21.11 0.99,21.46 0.99,23.47 0.71,23.75 0.33,23.75 0.1,23.52 0.1,14.12 0.38,13.84 1.32,13.84 1.5,14.02 1.5,14.99 1.8,15.29 4.09,15.29 4.29,15.09 5.49,15.09 6.25,15.85 6.25,16.59 5.87,16.97 4.22,16.97 2.82,18.36 2.82,20.78
GND on TOP: 4.88,20.09 10.26,20.09 10.82,19.53 10.82,18.97 10.49,18.64 9.68,18.64 9.65,18.67 9.09,18.11 8.15,18.11 7.52,18.75 4.93,18.75 4.55,19.13 4.55,19.76
GND on TOP: 0.56,26.21 4.19,26.21 4.47,25.93 5.49,25.93 5.87,26.31 9.47,26.31 9.6,26.44 9.6,26.95 9.53,27.03 9.12,27.03 8.92,26.82 6.07,26.82 5.71,26.47 4.57,26.47 3.66,27.38 0.53,27.38 0.33,27.18 0.33,26.44
GND on BOTTOM: 6.22,21.54 8.13,21.54 8.53,21.95 9.65,21.95 10.62,20.98 10.62,20.37 10.24,19.99 9.07,19.99 7.01,17.93 6.3,17.93 6.02,18.21 6.02,21.34
GND on BOTTOM: 29.31,7.49 28.24,7.49 27.56,6.81 26.31,6.81 25.73,6.22 25.73,4.98 25.98,4.72 29.03,4.72 29.59,5.28 29.59,7.21
GND on BOTTOM: 1.07,35.56 5.92,35.56 6.27,35.2 6.27,34.7 5.92,34.34 2.08,34.34 1.7,34.72 1.02,34.72 0.86,34.87 0.86,35.36
GND on GND: 0.51,0.25 0.23,0.53 0.23,39.47 0.53,39.78 29.49,39.78 29.79,39.47 29.79,0.69 29.41,0.3 14.73,0.3 14.68,0.25 ; 23 cut-outs
VCC_3.3V on BOTTOM: 1.78,19.2 2.67,18.31 4.88,18.31 5.16,18.59 5.16,20.17 4.57,20.75 2.01,20.75 1.78,20.52
VCC_3.3V on POWER: 0.56,39.83 29.34,39.83 29.79,39.37 29.79,22.56 29.26,22.02 26.21,22.02 23.8,19.61 8.86,19.61 5.33,16.08 0.61,16.08 0.23,16.46 0.23,39.5 ; 13 cut-outs
VCC_3.3VB on POWER: 0.46,0.18 29.39,0.18 29.82,0.61 29.82,21.23 29.49,21.56 26.47,21.56 24.1,19.2 9.14,19.2 5.54,15.6 0.53,15.6 0.18,15.24 0.18,0.46 ; 11 cut-outs
VCC_5V_IN on BOTTOM: 6.38,0.3 3.25,0.3 2.29,1.27 2.29,4.27 1.47,5.08 0.48,5.08 0.23,5.33 0.23,8.46 0.58,8.81 1.96,8.81 1.98,8.79 2.87,8.79 3.3,9.22 5.74,9.22 6.6,8.36 6.6,0.53

## Text on the board
Ref Des/Silkscreen Top: 2017.04.14 | working | F247_POWE_V12C | 5VI | 5VO
